# Altium PCB imx6_cpu_board.PcbDoc (part 4 of 9)
Units mil, origin at the board's own origin, x right, y up, seen from the top; angles counter-clockwise.
Board outline 2598.43 x 2362.2 mil, 8 copper layers (Top Layer, GND1, Signal Layer 1, POWER1, POWER2, Signal Layer 2, GND2, Bottom Layer), stack 66.304 mil thick; 354 components, 422 nets, 2180 pads, 1333 vias.
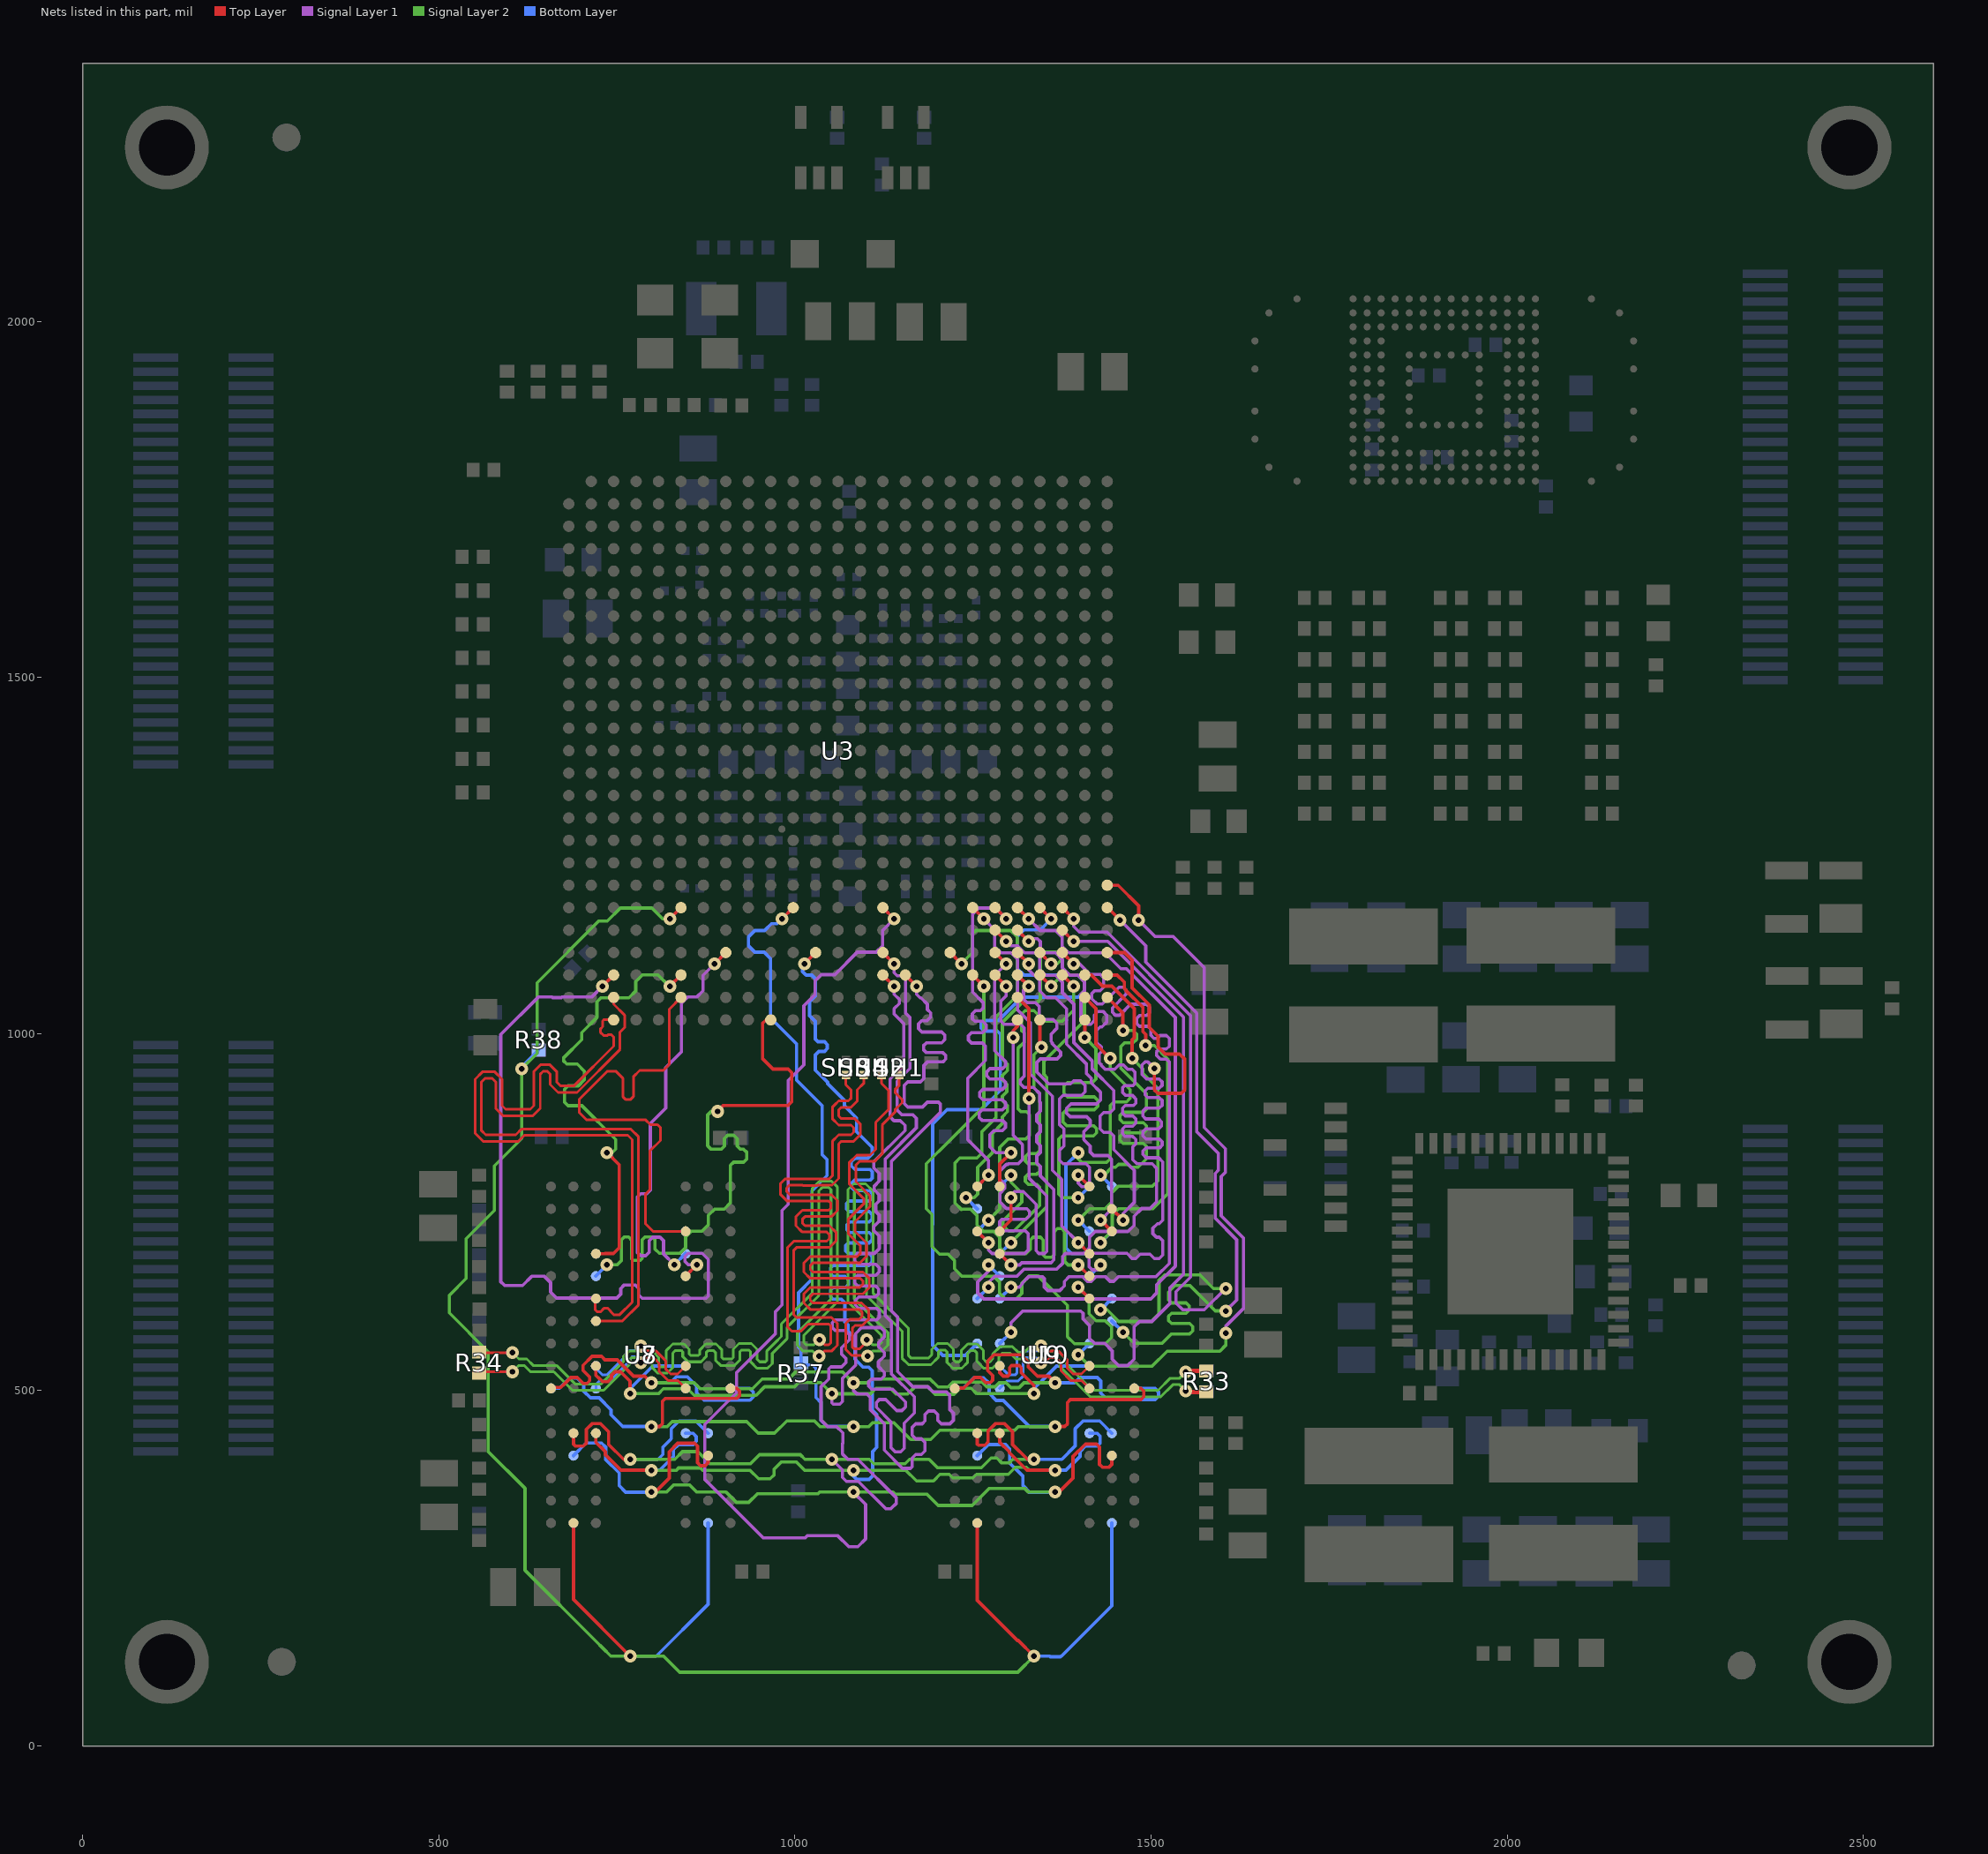
[diagram p10: the nets of this part, all layers, seen from the top]

## Via types
v1: diameter 18, hole 8, Top Layer to Bottom Layer, tented both sides, 768 vias
v2: diameter 20, hole 10, Top Layer to Bottom Layer, tented both sides, 565 vias

## Nets (pads, with @x,y where several pads share a name; then routed paths per layer and width w, separated by ;. In a path a pad name is that pad's centre, name@x,y a point inside that pad or via, vN(x,y) a via of type N, cw(c..) or ccw(c..) an arc to the next point about the centre after c; other vN are vias at no path point) (continued)
DRAM_D39: U3.AC19 U10.F7 | length 933.3
  Top Layer w4.7: U3.AC19@1249.36,1082.38 v1(1265.1,1066.63) ; v1(1397.62,643.83) U10.F7@1413.36,628.09
  Signal Layer 2 w4.5: 1217.47,850.43 1184.38,817.34 1184.38,754.34 1192.4,746.32 1192.4,701.02 1202.84,690.57 1214.97,690.57 1223.9,681.64 1223.9,670 1234.55,659.34 ; 1217.49,850.43 1237.88,870.82 1265.1,898.06 v1(1265.1,1066.63) ; 1234.59,659.38 1234.62,659.34 1279.38,659.34 1286.89,651.83 1286.89,635.83 1294.88,627.84 1310.88,627.84 1318.39,635.35 1318.39,649.35 1329.38,660.34 1340.58,660.34 1382.44,618.48 1382.44,587 1382.55,586.89 1382.55,574.45 1392.4,564.59 1435.63,564.59 1444.38,573.34 1444.38,588.14 1435.44,597.08 1422.8,597.08 1412.87,607.01 1412.87,628.58 v1(1397.62,643.83)
DRAM_D40: U3.Y19 U10.D7 | length 561.9
  Top Layer w4.7: U3.Y19@1249.36,1176.87 v1(1265.1,1161.12) ; v1(1397.62,706.82) U10.D7@1413.36,691.08
  Signal Layer 1 w4.5: v1(1265.1,1161.12) 1280.38,1145.84 1280.38,1122.34 1289.34,1113.38 1303.34,1113.38 1312.38,1104.34 1312.38,1033.34 1330.38,1015.34 1330.38,943.34 1361.38,912.34 1361.38,808.34 1374.38,795.34 1374.38,730.06 v1(1397.62,706.82)
DRAM_D41: U3.AB20 U10.A3 | length 563.5
  Top Layer w4.7: U3.AB20@1280.85,1113.88 v1(1296.6,1098.13) ; U10.A3@1287.38,785.57 1287.39,817.06 v1(1303.14,832.8)
  Signal Layer 1 w4.5: v1(1296.6,1098.13) 1280.38,1081.91 1280.38,976.11 1295.38,961.11 1295.38,955.11 1291.13,950.86 1273.6,950.86 1269.35,946.61 1269.35,940.61 1273.6,936.36 1291.13,936.36 1295.38,932.11 1295.38,926.11 1291.13,921.86 1263.63,921.86 1259.38,917.61 1259.38,911.61 1263.63,907.36 1291.13,907.36 1295.38,903.11 1295.38,897.11 1291.13,892.86 1262.63,892.86 1258.38,888.61 1258.38,882.61 1262.63,878.36 1291.13,878.36 1295.38,874.11 1295.38,868.11 1291.13,863.86 1278.9,863.86 1273.38,858.34 1273.38,841.34 1281.92,832.8 v1(1303.14,832.8)
DRAM_D42: U3.AB21 U10.C8 | length 559.1
  Top Layer w4.7: U3.AB21@1312.35,1113.88 v1(1328.1,1098.13) ; v1(1429.12,738.32) U10.C8@1444.86,722.58
  Signal Layer 1 w4.5: v1(1328.1,1098.13) 1328.1,1089.62 1343.38,1074.34 1343.38,1060.34 1353.33,1050.39 1365.91,1050.39 1381.38,1034.92 1381.38,985.33 1408.88,957.83 1408.88,944.34 1415.88,937.34 1415.88,930.84 1428.7,918.02 1428.7,906.66 1423.38,901.34 1387.38,901.34 1381.38,895.34 1381.38,888.34 1386.38,883.34 1409.38,883.34 1414.38,878.34 1414.38,871.34 1405.38,862.34 1405.38,851.34 1414.38,842.34 1414.38,833.84 1419.38,828.84 1439.38,828.84 1444.38,823.84 1444.38,753.58 v1(1429.12,738.32)
DRAM_D43: U3.AD21 U10.C3 | length 558.5
  Top Layer w4.7: U10.C3@1287.38,722.58 1303.14,738.32 v1(1303.14,769.81) ; U3.AD21@1312.35,1050.88 1328.1,1035.14 1328.1,909.62 v1(1328.38,909.34)
  Signal Layer 1 w4.5: v1(1303.14,769.81) 1303.14,773.34 1308.14,778.34 1320.38,778.34 1338.38,760.34 1338.38,695.34 1342.38,691.34 1350.38,691.34 1353.38,694.34 1353.38,772.34 1328.38,797.34 v1(1328.38,909.34)
DRAM_D44: U3.Y20 U10.A2 | length 560.1
  Top Layer w4.7: U10.A2@1255.88,785.57 v1(1271.64,801.31) ; U3.Y20@1280.85,1176.87 v1(1296.6,1161.12)
  Signal Layer 1 w4.5: v1(1271.64,801.31) 1271.64,822.08 1242.38,851.34 1242.38,937.34 1267.38,962.34 1267.38,982.57 1263.13,986.81 1247.63,986.81 1243.38,991.06 1243.38,997.07 1247.63,1001.31 1263.13,1001.31 1268.38,1006.56 1268.38,1012.34 1263.38,1017.34 1252.38,1017.34 1249.06,1020.66 1249.06,1028.02 1253.38,1032.34 1260.38,1032.34 1264.38,1036.34 1264.38,1043.34 1249.38,1058.34 1249.38,1167.67 1258.08,1176.37 1281.35,1176.37 v1(1296.6,1161.12)
DRAM_D45: U3.AA20 U10.B8 | length 566.3
  Top Layer w4.7: U3.AA20@1280.85,1145.37 v1(1296.6,1129.62) ; U10.B8@1444.86,754.07 v1(1460.62,738.32)
  Signal Layer 1 w4.5: v1(1296.6,1129.62) 1302.88,1123.34 1312.38,1123.34 1322.34,1113.38 1338.35,1113.38 1343.38,1108.35 1343.38,1090.34 1351.84,1081.88 1365.91,1081.88 1375.38,1072.41 1375.38,1057.34 1391.38,1041.34 1391.38,987.36 1417.38,961.36 1417.38,950.34 1447.38,920.34 1447.38,894.34 1442.38,889.34 1433.38,889.34 1428.38,884.34 1428.38,866.34 1433.38,861.34 1442.38,861.34 1447.38,856.34 1447.38,837.34 1476.38,808.34 1476.38,763.34 1460.62,747.58 v1(1460.62,738.32)
DRAM_D46: U3.AE21 U10.C2 | length 557.6
  Top Layer w4.7: U10.C2@1255.88,722.58 v1(1271.64,706.82) ; v1(1306.35,994.34) 1306.35,1004.34 1312.35,1010.34 U3.AE21@1312.35,1019.39
  Signal Layer 1 w4.5: v1(1271.64,706.82) 1271.64,696.34 1276.64,691.34 1322.38,691.34 1327.38,696.34 1327.38,719.34 1323.38,723.34 1291.38,723.34 1287.38,727.34 1287.38,736.34 1290.38,739.34 1324.38,739.34 1329.38,744.34 1329.38,750.34 1325.38,754.34 1299.38,754.34 1299.16,754.56 1296.82,754.56 1287.89,763.49 1287.89,776.13 1294.38,782.62 1294.38,788.5 1287.89,794.99 1287.89,807.63 1296.82,816.56 1298.6,816.56 1299.38,817.34 1313.38,817.34 1319.38,823.34 1319.38,844.31 1306.35,857.34 v1(1306.35,994.34)
DRAM_D47: U3.AC21 U10.A7 | length 559.1
  Top Layer w4.7: U3.AC21@1312.35,1082.38 v1(1328.1,1066.63) ; v1(1397.62,801.31) U10.A7@1413.36,785.57
  Signal Layer 1 w4.5: v1(1328.1,1066.63) 1325.88,1066.63 1320.88,1061.63 1320.88,1048.34 1325.88,1043.34 1337.82,1043.34 1342.82,1038.34 1342.82,1024.88 1347.82,1019.88 1362.38,1019.88 1367.38,1014.88 1367.38,1007.34 1359.38,999.34 1359.38,988.91 1361.1,987.19 1361.1,985.84 1372.88,974.05 1372.88,969.59 1367.88,964.59 1344.38,964.59 1339.38,959.59 1339.38,946.37 1356.16,929.59 1386.93,929.59 1391.37,934.03 1400.67,934.03 1407.38,927.32 1407.38,918.34 1402.38,913.34 1376.38,913.34 1371.38,908.34 1371.38,872.34 1377.38,866.34 1377.38,842.34 1371.38,836.34 1371.38,822.34 1376.38,817.34 1408.38,817.34 1413.38,812.34 1413.38,790.34 1408.38,785.34 1402.62,785.34 1397.62,790.34 v1(1397.62,801.31)
DRAM_D48: U3.AC22 U9.D7 | length 513.6
  Top Layer w4.7: U3.AC22@1343.84,1082.38 v1(1359.59,1066.63)
  Signal Layer 2 w4.5: v1(1303.14,706.82) 1353.38,757.06 1353.38,938.9 1349.26,943.02 1349.26,961.22 1406.34,1018.3 1406.34,1072.95 1397.41,1081.88 1374.84,1081.88 v1(1359.59,1066.63)
  Bottom Layer w4.7: U9.D7@1287.39,691.08 v1(1303.14,706.82)
DRAM_D49: U3.AE22 U9.A7 | length 510.2
  Top Layer w4.7: U3.AE22@1343.84,1019.39 1343.84,982.88 v1(1345.84,980.88)
  Signal Layer 2 w4.5: v1(1303.14,801.31) 1303.14,791.38 1318.39,776.13 1318.39,763.49 1291.68,736.79 1291.68,731.04 1299.97,722.75 1307.04,722.75 1343.63,759.34 1343.63,784.02 1339.38,788.27 1327.63,788.27 1323.38,792.52 1323.38,798.52 1327.63,802.77 1339.38,802.77 1343.63,807.02 1343.63,813.02 1339.38,817.27 1327.63,817.27 1323.38,821.52 1323.38,827.52 1327.63,831.77 1339.38,831.77 1343.63,836.02 1343.63,915.66 1335.38,923.91 1335.38,970.41 v1(1345.84,980.88)
  Bottom Layer w4.7: U9.A7@1287.39,785.57 v1(1303.14,801.31)
DRAM_D50: U3.AE24 U9.A3 | length 516.6
  Top Layer w4.7: v1(1406.84,994.8) U3.AE24@1406.84,1019.39
  Signal Layer 2 w4.5: v1(1397.62,769.81) 1375.38,769.81 1370.38,774.81 1370.38,852.18 1374.63,856.43 1419.13,856.43 1423.38,860.68 1423.38,866.68 1419.13,870.93 1381.38,870.93 1376.38,875.93 1376.38,888.34 1381.38,893.34 1420.38,893.34 1425.38,898.34 1425.38,906.34 1420.38,911.34 1382.38,911.34 1377.38,916.34 1377.38,926.34 1382.38,931.34 1417.38,931.34 1422.38,936.34 1422.38,979.25 v1(1406.84,994.8)
  Bottom Layer w4.7: v1(1397.62,769.81) U9.A3@1413.37,785.57
DRAM_D51: U3.AC24 U9.C3 | length 511.4
  Top Layer w4.7: U3.AC24@1406.84,1082.38 1416.06,1082.38 1431.81,1066.63 1444.86,1066.63 1476.38,1035.11 1476.38,994.34 1473.38,991.34 v1(1473.38,965.34)
  Signal Layer 2 w4.5: v1(1397.62,738.32) 1413.65,754.34 1435.22,754.34 1444.38,763.5 1444.38,776.34 1454.1,786.06 1502.1,786.06 1509.38,793.34 1509.38,923.34 1488.38,944.34 1488.38,950.34 v1(1473.38,965.34)
  Bottom Layer w4.7: v1(1397.62,738.32) U9.C3@1413.37,722.58
DRAM_D52: U3.AB22 U9.B8 | length 518.5
  Top Layer w4.7: U3.AB22@1343.84,1113.88 v1(1359.59,1098.13)
  Signal Layer 2 w4.5: v1(1240.14,769.81) 1251.38,769.81 1256.38,774.81 1256.38,812.34 1277.38,833.34 1277.38,860.34 1291.1,874.06 1291.1,883.17 1298.38,890.45 1298.38,898.88 1291.1,906.16 1291.1,912.17 1297.38,918.45 1297.38,928.88 1291.1,935.16 1291.1,941.17 1298.13,948.2 1298.13,957.14 1295.35,959.92 1291.1,964.16 1291.1,1016.06 1318.38,1043.34 1339.34,1043.34 1344.34,1048.34 1344.34,1109.37 1349.34,1114.37 1368.38,1114.37 1373.38,1109.37 1373.38,1103.13 1368.38,1098.13 v1(1359.59,1098.13)
  Bottom Layer w4.7: v1(1240.14,769.81) U9.B8@1255.89,754.07
DRAM_D53: U3.AC23 U9.C8 | length 510.4
  Top Layer w4.7: U3.AC23@1375.34,1082.38 v1(1391.09,1066.63)
  Signal Layer 2 w4.5: v1(1271.64,738.32) 1287.38,754.06 1287.38,840.34 1299.38,852.34 1324.38,852.34 1329.38,857.34 1329.38,886.26 1325.13,890.5 1317.13,890.5 1312.88,894.75 1312.88,979.3 1321.6,988.02 1321.6,1000.66 1317.88,1004.38 1317.88,1027.34 1322.88,1032.34 1335.38,1032.34 1350.38,1017.34 1375.38,1017.34 1391.09,1033.05 v1(1391.09,1066.63)
  Bottom Layer w4.7: U9.C8@1255.89,722.58 v1(1271.64,738.32)
DRAM_D54: U3.AD25 U9.A2 | length 510.9
  Top Layer w4.7: U3.AD25@1438.33,1050.88 1460.38,1028.84 v1(1460.38,1004.34)
  Signal Layer 2 w4.5: v1(1429.12,801.31) 1429.38,801.57 1434.31,801.57 1439.31,806.57 1439.31,807.34 1444.31,812.34 1450.08,812.34 1454.3,816.56 1466.93,816.56 1471.15,812.34 1481.58,812.34 1493.38,824.14 1493.38,841.85 1489.13,846.09 1460.63,846.09 1456.38,850.34 1456.38,856.35 1460.63,860.59 1489.13,860.59 1493.38,864.84 1493.38,870.85 1489.13,875.09 1460.63,875.09 1456.38,879.34 1456.38,885.35 1460.63,889.59 1489.13,889.59 1493.38,893.84 1493.38,915.59 1457.63,951.34 1457.63,982.34 1462.63,987.34 1474.81,987.34 1479.38,991.91 1479.38,999.34 1474.38,1004.34 v1(1460.38,1004.34)
  Bottom Layer w4.7: v1(1429.12,801.31) U9.A2@1444.87,785.57
DRAM_D55: U3.AC25 U9.C2 | length 515.5
  Top Layer w4.7: U3.AC25@1438.33,1082.38 1452.34,1082.38 1462.38,1072.34 1462.38,1063.34 1464.68,1061.04 1464.68,1060.73 1488.34,1037.07 1488.34,1002.93 1492.38,998.89 v1(1492.38,983.34)
  Signal Layer 2 w4.5: v1(1429.12,706.82) 1429.12,707.08 1445.37,723.33 1445.37,745.33 1454.38,754.34 1502.38,754.34 1523.38,775.34 1523.38,964.34 1504.38,983.34 v1(1492.38,983.34)
  Bottom Layer w4.7: v1(1429.12,706.82) U9.C2@1444.87,722.58
DRAM_D56: U3.AB25 U9.E3 | length 1011.3
  Top Layer w4.7: U3.AB25@1438.33,1113.88 1462.84,1113.88 1473.38,1103.34 1473.38,1064.34 1497.33,1040.39 1497.33,1008.89 1509.83,996.39 1509.83,981.39 1519.83,971.39 1539.83,971.39 1547.33,963.89 1547.33,921.39 1542.33,916.39 1509.38,916.39 1504.38,921.39 v1(1504.38,951.34)
  Signal Layer 1 w4.5: v1(1429.12,675.32) 1429.12,673.34 1424.3,668.52 1417.23,668.52 1412.87,672.88 1412.87,685.38 1419.06,691.57 1465.94,691.57 1473.17,684.34 1478.38,684.34 1484.61,690.57 1498.43,690.57 1504.66,684.34 1511.38,684.34 1516.38,689.34 1516.38,709.34 1511.38,714.34 1507.38,714.34 1502.38,719.34 1502.38,727.02 1508.7,733.34 1511.38,733.34 1516.38,738.34 1516.38,819.79 1510.33,825.84 1492.99,825.84 1488.38,830.45 1488.38,835.31 1492.63,839.56 1511.6,839.56 1515.36,843.32 1515.36,848.36 1511.66,852.06 1492.66,852.06 1488.38,856.34 1488.38,862.34 1492.38,866.34 1510.38,866.34 1514.38,870.34 1514.38,876.34 1510.38,880.34 1492.38,880.34 1488.38,884.34 1488.38,891.34 1492.38,895.34 1511.36,895.34 1515.36,899.34 1515.36,906.34 1511.36,910.34 1495.19,910.34 1491.38,914.15 1491.38,919.53 1495.19,923.34 1511.38,923.34 1515.38,927.34 1515.38,932.34 1511.38,936.34 1493.38,936.34 1487.06,942.66 1487.06,956.02 1491.38,960.34 1495.38,960.34 v1(1504.38,951.34)
  Bottom Layer w4.7: U9.E3@1413.37,659.59 v1(1429.12,675.32)
DRAM_D57: U3.AA21 U9.F8 | length 1016.3
  Top Layer w4.7: U3.AA21@1312.35,1145.37 v1(1328.1,1129.62)
  Signal Layer 1 w4.5: v1(1271.64,643.83) 1271.64,650.69 1280.29,659.34 1311.38,659.34 1318.86,666.82 ; 1318.91,666.82 1321.43,669.34 1367.38,669.34 1375.88,677.84 1375.88,687.43 1379.79,691.34 1405.38,691.34 1413.38,699.34 1413.38,714.34 1421.38,722.34 1467.38,722.34 1475.87,730.83 1475.87,743.64 ; v1(1328.1,1129.62) 1331.81,1133.34 1340.38,1133.34 1344.34,1129.38 1344.34,1119.42 1350.38,1113.38 1365.91,1113.38 1375.38,1103.91 1375.38,1092.34 1375.84,1091.88 1375.84,1091.81 1384.77,1082.88 1384.84,1082.88 1385.84,1081.88 1397.41,1081.88 1406.34,1072.95 1406.34,1071.54 1406.38,1071.49 1406.38,1061.77 1406.34,1061.73 1406.34,1060.31 1401.38,1055.35 1401.38,1018.34 1406.38,1013.34 1415.38,1013.34 1420.38,1018.34 1420.38,1026.34 1425.38,1031.34 1432.38,1031.34 1437.38,1026.34 1437.38,1015.91 1430.81,1009.34 1428.38,1009.34 1423.38,1004.34 1423.38,1001.41 1423.08,1001.12 1423.08,988.48 1423.38,988.18 1423.38,987.77 1430.38,980.77 1430.38,974.91 1427.13,971.66 1427.13,959.02 1430.38,955.77 1430.38,955.09 1435.38,950.09 1448.7,950.09 1454.95,956.34 1460.81,956.34 1467.06,950.09 1473.38,950.09 1477.38,946.09 1477.38,930.18 1474.38,927.18 1462.63,927.18 1459.88,924.43 1459.88,917.42 1463.63,913.68 1473.13,913.68 1476.88,909.93 1476.88,909.82 1478.38,908.32 1478.38,902.42 1475.13,899.18 1463.63,899.18 1459.88,895.43 1459.88,888.42 1463.63,884.68 1474.13,884.68 1478.38,880.43 1478.38,874.42 1474.13,870.18 1463.63,870.18 1459.88,866.43 1459.88,859.42 1463.63,855.68 1474.13,855.68 1478.38,851.43 1478.38,845.42 1474.13,841.18 1474.13,823.18 1479.97,817.34 1501.36,817.34 1507.36,811.34 1507.36,763.49 1498.43,754.56 1486.78,754.56 1475.87,743.65
  Bottom Layer w4.7: U9.F8@1255.89,628.09 v1(1271.64,643.83)
DRAM_D58: U3.Y25 U9.G2 | length 1015.6
  Top Layer w4.7: U3.Y25@1438.33,1176.87 1438.85,1176.87 v1(1456.38,1159.34)
  Signal Layer 1 w4.5: v1(1456.38,1159.34) 1492.38,1123.34 1492.38,1100.34 1563.88,1028.84 1563.88,862.41 1594.33,831.96 1594.33,808.39 1589.83,803.89 1589.83,740.86 1619.94,710.75 1619.94,626.17 v1(1604.6,610.84)
  Signal Layer 2 w4.5: v1(1460.62,580.84) 1476.11,565.34 1515.38,565.34 1528.63,578.59 1554.13,578.59 1558.38,582.83 1558.38,588.84 1554.13,593.09 1528.63,593.09 1524.38,597.33 1524.38,603.34 1528.63,607.59 1549.13,607.59 1553.38,611.83 1553.38,617.84 1549.13,622.09 1528.63,622.09 1524.38,626.33 1524.38,637.34 1533.38,646.34 1554.38,646.34 1589.88,610.84 v1(1604.6,610.84)
  Bottom Layer w4.7: U9.G2@1444.87,596.59 v1(1460.62,580.84)
DRAM_D59: U3.Y22 U9.H8 | length 1020.5
  Top Layer w4.7: U3.Y22@1343.84,1176.87 v1(1359.59,1161.12)
  Bottom Layer w4.7: 1193.3,587.2 1193.3,562.42 1207.38,548.34 1239.14,548.34 U9.H8@1255.89,565.1 ; 1193.3,605.97 1193.3,618.69 ; 1193.3,637.47 1193.3,650.19 ; 1193.3,668.96 1193.3,681.68 ; 1193.3,744.68 1193.3,732.17 1193.05,731.92 1193.05,700.22 1193.33,699.94 1193.33,681.72 ; 1193.3,763.45 1193.3,776.17 ; 1193.3,794.95 1193.3,807.67 ; 1193.33,587.23 1193.33,605.94 ; 1193.33,618.72 1193.33,637.44 ; 1193.33,650.22 1193.33,668.93 ; 1193.33,744.71 1193.33,763.42 ; 1193.33,776.2 1193.33,794.92 ; 1193.33,807.7 1193.33,873.29 1213.38,893.34 1261.38,893.34 1288.38,920.34 1288.38,999.26 1284.07,1003.56 1265.69,1003.56 1261.38,1007.87 1261.38,1013.95 1265.69,1018.26 1285.38,1018.26 1318.4,1051.28 1397.45,1051.28 1406.44,1060.27 1406.44,1072.99 1397.09,1082.34 1321.38,1082.34 1311.95,1091.77 1311.95,1135.98 1321.74,1145.77 1344.24,1145.77 v1(1359.59,1161.12)
DRAM_D60: U3.AB23 U9.F7 | length 1014.9
  Top Layer w4.7: U3.AB23@1375.34,1113.88 v1(1391.09,1098.13)
  Signal Layer 1 w4.5: v1(1303.14,643.83) 1314.38,643.83 1319.38,648.83 1319.38,650.15 1328.31,659.08 1347.19,659.08 1349.88,656.39 1349.88,644.34 1354.88,639.34 1371.57,639.34 1377.97,645.75 1377.97,652.03 1385.02,659.08 1403.94,659.08 1410.68,652.34 1416.06,652.34 1422.8,659.08 1435.44,659.08 1442.18,652.34 1447.56,652.34 1454.3,659.08 1507.12,659.08 1525.38,677.34 1525.38,960.34 1521.38,964.34 1512.95,964.34 1507.38,969.91 1507.38,974.34 1511.38,978.34 1521.38,978.34 1525.38,982.34 1525.38,993.34 1521.38,997.34 1512.38,997.34 1508.38,993.34 1503.95,993.34 1499.38,997.91 1499.38,1006.34 1495.38,1010.34 1483.38,1010.34 1479.38,1014.34 1479.38,1021.34 1483.38,1025.34 1493.38,1025.34 1497.38,1029.34 1497.38,1037.34 1493.38,1041.34 1471.19,1041.34 1455.78,1025.94 1449.78,1025.94 1445.53,1030.19 1445.53,1036.2 1464.67,1055.34 1464.67,1061.05 1460.63,1065.09 1454.92,1065.09 1431.38,1041.55 1424.31,1041.55 1416.64,1049.23 1416.64,1056.3 1420.52,1060.19 1428.38,1060.19 1433.38,1065.19 1433.38,1078.34 1428.77,1082.95 1414.77,1082.95 1399.59,1098.13 v1(1391.09,1098.13)
  Bottom Layer w4.7: U9.F7@1287.39,628.09 v1(1303.14,643.83)
DRAM_D61: U3.AA23 U9.H7 | length 1012.4
  Top Layer w4.7: U3.AA23@1375.34,1145.37 v1(1391.09,1129.62)
  Signal Layer 1 w4.5: v1(1303.14,580.84) 1303.14,594.1 1319.62,610.58 1401.14,610.58 1404.38,607.34 1404.38,599.48 1413.38,590.48 1413.38,572.34 1420.13,565.59 1434.44,565.59 1445.37,554.66 1445.37,543.02 1454.3,534.09 1466.93,534.09 1475.87,543.02 1475.87,588.34 1483.61,596.09 1501.13,596.09 1526.38,621.34 1526.38,643.34 1545.38,662.34 1545.38,1023.28 1439.04,1129.62 v1(1391.09,1129.62)
  Bottom Layer w4.7: U9.H7@1287.39,565.1 v1(1303.14,580.84)
DRAM_D62: U3.Y23 U9.F2 | length 1013.9
  Top Layer w4.7: U3.Y23@1375.34,1176.87 v1(1391.09,1161.12)
  Signal Layer 1 w4.5: v1(1391.09,1161.12) 1391.09,1150.58 1399.03,1142.64 1438.05,1142.64 1555.38,1025.31 1555.38,658.39 1534.88,637.89 1534.88,621.84 1544.38,612.34 1574.61,612.34 v1(1604.6,642.33)
  Signal Layer 2 w4.5: v1(1429.12,612.33) 1438.13,612.33 1454.38,596.09 1500.43,596.09 1511.03,606.69 1511.03,653.64 1518.73,661.34 1568.59,661.34 1587.6,642.33 v1(1604.6,642.33)
  Bottom Layer w4.7: v1(1429.12,612.33) U9.F2@1444.87,628.09
DRAM_D63: U3.W25 U9.H3 | length 1012.2
  Top Layer w4.7: U3.W25@1438.33,1208.36 1453.69,1208.36 1482.38,1179.67 v1(1482.38,1159.34)
  Signal Layer 1 w4.5: v1(1482.38,1159.34) 1505.38,1136.34 1530.82,1136.34 1574.38,1092.78 1574.38,868.34 1604.33,838.39 1604.33,805.39 1598.33,799.39 1598.33,744.39 1629.37,713.35 1629.37,614.05 1604.6,589.28 v1(1604.6,579.34)
  Signal Layer 2 w4.5: v1(1397.62,549.34) 1413.87,533.09 1501.13,533.09 1522.38,554.34 1596.34,554.34 1604.6,562.6 v1(1604.6,579.34)
  Bottom Layer w4.7: v1(1397.62,549.34) U9.H3@1413.37,565.1
DRAM_DQM0: U3.AC3 U8.E7 | length 1025.1
  Top Layer w4.7: v1(729.67,1066.63) U3.AC3@745.42,1082.38 ; U8.E7@846.43,659.59 846.44,659.89 v1(862.13,675.58)
  Signal Layer 1 w4.5: v1(729.67,1066.63) 714.42,1051.38 673,1051.38 672.21,1050.59 659.57,1050.59 658.78,1051.38 639.42,1051.38 586.89,998.85 586.89,651.83 592.38,646.34 617.38,646.34 630.38,659.34 648.19,659.34 656.89,650.64 656.89,637.34 665.4,628.83 749.87,628.83 755.38,634.34 755.38,642.34 760.38,647.34 775.38,647.34 780.38,642.34 780.38,633.59 785.38,628.59 875.38,628.59 878.37,631.58 878.37,681.9 ; v1(862.13,675.58) 850.14,675.58 845.38,680.34 845.38,687.34 849.86,691.82 869.71,691.82 878.4,683.14 878.4,681.93
DRAM_DQM1: U3.AC6 U8.D3 | length 653.9
  Top Layer w4.7: U8.D3@720.45,691.08 733.13,691.07 733.38,691.32 745.1,691.32 753.27,699.49 753.27,815.91 v1(736.13,833.06) ; v1(824.16,1066.63) U3.AC6@839.91,1082.38
  Signal Layer 2 w4.5: v1(736.13,833.06) 743.38,833.06 748.38,838.06 748.38,851.44 700.98,898.84 681.38,898.84 676.38,903.84 676.38,921.74 681.38,926.74 695.78,926.74 704.38,935.34 704.38,947.34 694.38,957.34 679.38,957.34 675.38,961.34 675.38,966.34 700.38,991.34 700.38,1001.34 721.92,1022.88 721.92,1044.88 727.38,1050.34 766.83,1050.34 776.44,1059.95 776.44,1073.4 785.38,1082.34 807.78,1082.34 823.49,1066.63 v1(824.16,1066.63)
DRAM_DQM2: U3.AB8 U7.D3 | length 608.4
  Top Layer w4.7: v1(887.15,1098.13) U3.AB8@902.9,1113.88
  Signal Layer 1 w4.5: v1(830.63,675.58) 815.37,690.84 815.37,709.34 810.37,714.34 800.38,714.34 795.38,709.34 795.38,693.34 790.38,688.34 783.38,688.34 778.38,693.34 778.38,770.24 783.38,775.24 791.89,775.24 796.89,780.24 796.89,873.85 818.53,895.49 818.53,952.49 840.41,974.37 840.41,1042.45 849.34,1051.38 861.98,1051.38 870.91,1060.31 870.91,1081.88 v1(887.15,1098.13)
  Bottom Layer w4.7: v1(830.63,675.58) 846.29,691.23 846.38,691.32 846.44,691.26 U7.D3@846.44,691.08
DRAM_DQM3: U3.AE10 U7.E7 | length 848.2
  Top Layer w4.7: v1(891.38,890.84) 894.73,894.19 894.73,894.34 899.73,899.34 990.38,899.34 995.38,904.34 995.38,945.34 990.38,950.34 969.19,950.34 954.38,965.15 954.38,1014.39 959.38,1019.39 U3.AE10@965.89,1019.39
  Signal Layer 2 w4.5: v1(736.13,675.58) 750.37,675.58 756.36,681.57 756.36,710.57 760.39,714.59 766.39,714.59 770.86,710.12 770.86,683.84 773.11,681.59 782.39,681.59 785.36,684.57 785.36,710.57 789.39,714.59 799.39,714.59 803.39,710.59 803.39,697.59 809.39,691.59 838.39,691.59 846.39,699.59 846.39,714.59 854.39,722.59 869.39,722.59 878.39,731.59 878.39,732.24 ; 878.37,732.25 878.37,744.89 887.31,753.82 899.94,753.82 900.11,753.65 900.45,753.65 909.39,762.59 909.39,815.17 913.89,819.67 927.88,819.67 932.38,824.17 932.38,833.17 927.88,837.67 923.35,837.67 918.85,842.17 918.85,852.84 914.35,857.34 905.35,857.34 900.85,852.84 900.85,842.17 896.35,837.67 882.38,837.67 877.38,842.67 877.38,885.84 882.38,890.84 v1(891.38,890.84)
  Bottom Layer w4.7: U7.E7@720.46,659.59 720.46,659.75 720.38,659.83 v1(736.13,675.58)
DRAM_DQM4: U3.AB18 U10.E7 | length 927
  Top Layer w4.7: U3.AB18@1217.86,1113.88 v1(1233.61,1098.13) ; v1(1397.62,675.32) U10.E7@1413.36,659.59
  Signal Layer 2 w4.5: v1(1233.61,1098.13) 1248.86,1113.38 1248.86,1139.87 1253.86,1144.87 1302.92,1144.87 1311.85,1135.94 1311.85,1053.34 1282.1,1023.59 1282.1,882.06 1262.38,862.34 1262.38,832.34 1255.38,825.34 1231.38,825.34 1224.38,818.34 1224.38,762.34 1233.49,753.23 1233.83,753.57 1246.46,753.57 1255.39,744.63 1255.39,732 ; 1255.38,731.98 1255.38,731.34 1264.38,722.34 1279.38,722.34 1287.38,714.34 1287.38,699.34 1295.38,691.34 1324.38,691.34 1330.38,697.34 1330.38,710.34 1334.38,714.34 1344.38,714.34 1348.4,710.32 1348.4,689.32 1351.38,686.34 1360.66,686.34 1363.9,689.59 1363.9,721.86 1368.38,726.34 1374.38,726.34 1378.4,722.32 1378.4,680.32 1383.4,675.32 v1(1397.62,675.32)
DRAM_DQM5: U3.AC20 U10.D3 | length 564.6
  Top Layer w4.7: U3.AC20@1280.85,1082.38 v1(1296.6,1066.63) ; U10.D3@1287.38,691.08 v1(1303.14,675.32)
  Signal Layer 1 w4.5: v1(1296.6,1066.63) 1296.6,1053.34 1288.88,1045.62 1288.88,1017.84 1293.38,1013.34 1316.88,1013.34 1321.88,1008.34 1321.88,940.32 1316.38,934.82 1316.38,929.59 1321.38,924.59 1334.7,924.59 1343.63,915.66 1343.63,904.34 1344.38,903.59 1344.38,891.3 1339.38,886.3 1339.38,876.8 1344.38,871.8 1344.38,862.3 1339.38,857.3 1339.38,847.8 1344.38,842.8 1344.38,833.3 1339.38,828.3 1339.38,818.8 1344.38,813.8 1344.38,800.32 1363.38,781.32 1363.38,682.32 1359.4,678.34 1318.4,678.34 1315.38,675.32 v1(1303.14,675.32)
DRAM_DQM6: U3.AD24 U9.D3 | length 509.5
  Top Layer w4.7: U3.AD24@1406.84,1050.88 1422.58,1035.14 1422.58,1012.86 1422.38,1012.66 1422.38,985.34 v1(1442.38,965.34)
  Signal Layer 2 w4.5: v1(1397.62,832.8) 1397.62,824.34 1402.62,819.34 1437.38,819.34 1442.38,824.34 1442.38,899.34 1447.38,904.34 1465.38,904.34 1470.38,909.34 1470.38,921.34 1442.38,949.34 v1(1442.38,965.34)
  Bottom Layer w4.7: v1(1397.62,832.8) 1380.48,815.66 1380.48,699.24 1388.65,691.07 U9.D3@1413.37,691.08
DRAM_DQM7: U3.Y21 U9.E7 | length 1016.8
  Top Layer w4.7: U3.Y21@1312.35,1176.87 v1(1328.1,1161.12)
  Signal Layer 1 w4.5: v1(1271.64,675.32) 1271.64,666.6 1256.39,651.35 1256.39,636.28 1265.09,627.58 1499.38,627.58 1507.36,635.56 1507.36,647.06 1533.88,673.58 1533.88,1022.75 1465.24,1091.39 1457.33,1091.39 1435.27,1113.45 1416.27,1113.45 1416.2,1113.38 1384.34,1113.38 1374.84,1122.88 1374.84,1135.94 1365.91,1144.87 1344.34,1144.87 v1(1328.1,1161.12)
  Bottom Layer w4.7: v1(1271.64,675.32) U9.E7@1287.39,659.59
DRAM_RAS_B: U3.AB15 U7.J3 U8.J3 U9.J3 U10.J3 | length 2284.2
  Top Layer w4.7: U8.J3@720.45,533.6 720.46,520.45 725.46,515.45 725.99,515.45 730.05,511.39 737.33,511.39 742.33,516.39 742.33,520.34 747.33,525.34 755.07,525.34 768.38,512.03 768.38,494.66 v1(768.45,494.59) ; U3.AB15@1123.37,1113.88 v1(1139.12,1098.13) ; U10.J3@1287.38,533.6 1287.39,524.34 1292.39,519.34 1298.38,519.34 1301.38,522.34 1301.38,531.34 1304.06,534.02 1314.63,534.02 1317.34,531.3 1317.34,524.3 1335.31,506.34 v1(1335.38,494.59) v1(1335.38,494.59)
  Signal Layer 1 w4.5: v1(1051.88,494.59) 1051.88,481.84 1053.88,479.84 1062.88,479.84 1066.63,483.59 1066.63,516.26 1085.04,534.67 1085.04,579 1093.38,587.34 1120.38,587.34 1125.38,582.34 1125.38,574.34 1117.38,566.34 1117.38,560.34 1125.38,552.34 1125.38,547.54 1117.13,539.3 1117.13,532.8 1125.38,524.55 1125.38,519.55 1121.13,515.3 1107.59,515.3 1103.38,511.08 1103.38,505.13 1107.59,500.91 1137.13,500.91 1155.01,483.04 1155.01,475.97 1149.92,470.88 1142.84,470.88 1127.31,486.41 1118.38,486.41 1114.13,482.17 1114.13,475.62 1134.88,454.87 1134.88,418.79 1140.57,413.09 1148.45,413.09 1153.38,418.02 1153.38,453.34 1167.38,467.34 1167.38,490.34 1135.37,522.35 1135.37,595.35 1126.87,603.85 1126.87,824.43 1170.38,867.94 1170.38,881.34 1165.38,886.34 1149.81,886.34 1143.38,892.77 1143.38,933.31 1161.38,951.31 1161.38,1022.8 1155.37,1028.82 1155.37,1069.35 ; v1(1139.12,1098.13) 1139.12,1085.6 1143.38,1081.34 1150.38,1081.34 1155.38,1076.34 1155.38,1069.37
  Signal Layer 2 w4.5: v1(768.45,494.59) 808.38,494.59 815.23,501.44 849.28,501.44 858.38,492.34 945.38,492.34 957.38,504.34 999.38,504.34 1005.38,510.34 1036.13,510.34 v1(1051.88,494.59) 1051.93,494.54 1105.98,494.54 1113.78,502.34 1133.38,502.34 1141.38,494.34 1158.38,494.34 1168.38,504.34 1186.41,504.34 1196.86,493.89 1223.38,493.89 1231.83,502.34 1247.55,502.34 1255.3,494.59 v1(1335.38,494.59)
  Bottom Layer w4.7: v1(768.45,494.59) 768.45,501.65 789.74,522.94 ; 789.74,522.99 800.34,533.59 U7.J3@846.44,533.6 ; v1(1335.38,494.59) 1335.38,501.65 1356.72,522.99 ; 1356.74,522.99 1367.34,533.59 U9.J3@1413.37,533.6
DRAM_RESET_B: R38.1 U3.Y6 U7.T2 U8.T2 U9.T2 U10.T2 | length 2947.3
  Top Layer w4.7: U8.T2@688.95,313.13 688.96,205.68 v1(768.45,126.19) ; v1(824.16,1161.12) U3.Y6@839.91,1176.87 ; U10.T2@1255.88,313.13 1255.89,204.52 1312.22,148.19 1313.38,148.19 v1(1335.38,126.19)
  Signal Layer 2 w4.5: v1(824.16,1161.12) 814.23,1161.12 798.98,1176.37 754.85,1176.37 736.48,1158 724.44,1158 637.89,1071.44 637.89,972.42 v1(616.27,950.8) 616.27,852.73 577.88,814.34 577.88,751.84 538.38,712.34 538.38,656.38 514.63,632.64 514.63,608.09 569.38,553.34 569.38,413.34 620.89,361.83 620.89,246.83 721.08,146.64 721.15,146.64 730.08,137.71 730.08,137.64 741.53,126.19 v1(768.45,126.19) 815.53,126.19 838.12,103.6 1312.78,103.6 v1(1335.38,126.19)
  Bottom Layer w4.5: v1@616.95,951.49 616.95,953.92 R38.1@639.99,976.95
  Bottom Layer w4.7: v1(768.45,126.19) 805.3,126.19 877.94,198.83 U7.T2@877.94,313.13 ; v1(1335.38,126.19) 1357.6,126.19 1358.6,125.19 1372.16,125.19 1373.16,126.19 1374.23,126.19 1444.87,196.83 U9.T2@1444.87,313.13
  Bottom Layer w10: v1(616.27,950.8) v1@616.95,951.49
DRAM_SDBA0: U3.AC15 U7.M2 U8.M2 U9.M2 U10.M2 | length 2502.4
  Top Layer w4.7: U8.M2@688.95,439.11 688.96,423.84 691.85,420.96 703.11,420.96 707.11,424.96 707.1,444.64 715.01,452.54 727.18,452.54 738.38,441.34 738.38,423.41 759.3,402.49 v1(768.45,402.49) ; U3.AC15@1123.37,1082.38 v1(1139.12,1066.63) ; U10.M2@1255.88,439.11 1255.89,423.83 1257.38,422.34 1266.56,422.34 1270.98,426.76 1270.98,442.34 1281.18,452.54 1294.11,452.54 1305.31,441.34 1305.31,423.41 1326.23,402.49 v1(1335.38,402.49)
  Signal Layer 1 w4.5: v1(1051.88,402.49) 1066.63,387.74 1066.63,377.09 1072.03,371.69 1089.03,371.69 1127.38,333.34 1134.88,333.34 1142.37,340.83 1142.37,348.22 1088.19,402.39 1074.33,402.39 1066.38,410.34 1066.38,423.91 1067.13,424.66 1067.13,439.51 1058.2,448.44 1046.38,448.44 1046.18,448.64 1045.56,448.64 1036.63,457.57 1036.63,504.59 1047.38,515.34 1047.38,529.28 1050.34,532.24 1065.34,532.24 1071.34,538.24 1071.34,544.24 1065.34,550.24 1065.34,559.24 1076.54,570.45 1076.54,577.24 1070.54,583.24 1056.34,583.24 1052.34,587.24 1052.34,594.34 1056.34,598.34 1114.69,598.34 1118.37,602.02 1118.37,610.66 1114.69,614.34 1089.38,614.34 1084.38,619.34 1084.38,625.34 1089.38,630.34 1112.77,630.34 1117.38,634.95 1117.38,641.47 1112.77,646.09 1087.63,646.09 1083.88,649.83 1083.88,656.84 1087.63,660.59 1113.37,660.59 1118.37,665.59 1118.37,671.34 1113.37,676.34 1088.88,676.34 1083.88,681.34 1083.88,687.15 1088.07,691.34 1111.38,691.34 1118.37,698.33 1118.37,715.78 1110.38,723.77 1110.38,728.98 1118.37,736.97 1118.37,745.35 1113.38,750.34 1113.38,760.34 1118.37,765.33 1118.37,773.35 1115.38,776.34 1115.38,776.48 1111.38,780.48 1111.38,786.19 1118.37,793.19 1118.37,803.86 1110.38,811.86 1110.38,819.97 1154.38,863.97 1154.38,871.34 1147.88,877.84 1138.88,877.84 1133.38,883.34 1133.38,936.34 1152.88,955.84 1152.88,1013.84 1139.12,1027.6 1139.12,1035.08 1146.38,1042.34 1146.38,1048.08 1139.12,1055.34 v1(1139.12,1066.63)
  Signal Layer 2 w4.5: v1(768.45,402.49) 831.23,402.49 842.08,413.34 863.38,413.34 880.38,396.34 937.38,396.34 950.05,409.01 1007.45,409.01 1013.97,402.49 v1(1051.88,402.49) 1051.98,402.59 1104.38,402.59 1110.63,396.34 1154.38,396.34 1160.63,402.59 1187.7,402.59 1187.8,402.49 1188.18,402.49 1199.33,391.34 1199.85,390.84 1261.73,390.84 1275.23,404.34 1283.53,404.34 1290.53,397.34 1300.38,397.34 1305.53,402.49 v1(1335.38,402.49)
  Bottom Layer w4.7: v1(768.45,402.49) 807.6,402.49 814.45,409.34 814.45,419.54 826.38,431.47 826.38,445.34 837.38,456.34 860.7,456.34 U7.M2@877.94,439.11 ; v1(1335.38,402.49) 1374.53,402.49 1393.31,421.27 1393.31,445.34 1404.31,456.34 1427.63,456.34 U9.M2@1444.87,439.11
DRAM_SDBA1: U3.Y15 U7.N8 U8.N8 U9.N8 U10.N8 | length 2560.3
  Top Layer w4.7: v1(798.45,356.44) 803.55,356.44 823.45,376.34 823.45,413.04 835.41,424.99 859.13,424.99 863.13,420.99 863.13,397.64 867.13,393.64 873.94,393.64 877.94,397.64 U8.N8@877.93,407.62 ; U3.Y15@1123.37,1176.87 v1(1139.12,1161.12) ; v1(1365.38,356.44) 1370.48,356.44 1390.38,376.34 1390.38,406.41 1407.81,423.84 1423.38,423.84 1427.38,419.84 1427.38,395.44 1431.38,391.44 1440.87,391.44 1444.87,395.44 U10.N8@1444.86,407.62
  Signal Layer 1 w4.5: v1(1081.88,356.44) 1099.18,339.14 1099.18,290.78 1088.2,279.79 1075.56,279.79 1060.21,295.14 1017.18,295.14 1014.38,292.34 955.38,292.34 873.38,374.34 873.38,451.34 917.88,495.84 917.88,524.27 972.63,579.02 972.63,610.09 981.88,619.34 981.88,751.84 990.38,760.34 990.38,934.34 1012.38,956.34 1012.38,1039.34 1028.39,1055.35 1028.39,1074.34 1036.92,1082.88 1055.92,1082.88 1087.41,1114.37 1113.94,1114.37 1122.87,1123.3 1122.87,1144.87 v1(1139.12,1161.12)
  Signal Layer 2 w4.5: v1(798.45,356.44) 819.48,356.44 829.38,366.34 852.43,366.34 862.33,356.44 903.28,356.44 917.62,342.1 935.11,342.1 947.35,354.34 1032.28,354.34 1034.38,356.44 v1(1081.88,356.44) 1137.38,356.44 1140.48,353.34 1185.36,353.34 1200.86,337.84 1248.79,337.84 1272.33,361.39 1322.79,361.39 1327.73,356.44 v1(1365.38,356.44)
  Bottom Layer w4.7: U7.N8@688.96,407.62 706.7,425.34 728.45,425.34 734.38,419.41 734.38,401.96 753.1,383.24 753.1,365.43 762.09,356.44 v1(798.45,356.44) ; U9.N8@1255.89,407.62 1271.5,423.22 1295.5,423.22 1301.31,417.41 1301.31,397.41 1320.03,378.69 1320.03,365.43 1329.02,356.44 v1(1365.38,356.44)
DRAM_SDBA2: U3.AB12 U7.M3 U8.M3 U9.M3 U10.M3 | length 2328.9
  Top Layer w4.7: U8.M3@720.45,439.11 720.46,426.49 733.81,413.14 733.81,408.91 755.58,387.14 v1(798.45,387.14) ; v1(1013.14,1098.13) U3.AB12@1028.88,1113.88 ; U10.M3@1287.38,439.11 1287.39,426.49 1300.74,413.14 1300.74,411.98 1325.58,387.14 v1(1365.38,387.14)
  Signal Layer 2 w4.5: v1(798.45,387.14) 833.38,387.14 836.58,390.34 867.33,390.34 870.53,387.14 936.81,387.14 948.86,375.09 965.13,375.09 970.52,380.48 970.52,388.58 975.43,393.49 980.54,398.59 1002.13,398.59 1013.58,387.14 v1(1081.88,387.14) 1155.58,387.14 1170.63,372.09 1194.38,372.09 1203.63,381.34 1216.38,381.34 1221.38,376.34 1249.83,376.34 1254.83,381.34 1299.38,381.34 1309.38,391.34 1324.96,391.34 1329.06,387.24 1329.48,387.24 1329.58,387.14 v1(1365.38,387.14)
  Bottom Layer w4.7: v1(798.45,387.14) 810.13,387.14 829.36,406.37 829.36,416.32 836.38,423.34 856.76,423.34 861.38,427.96 861.38,434.49 856.76,439.1 U7.M3@846.44,439.11 ; v1(1013.14,1098.13) 1010.69,1095.68 1010.69,1087.34 1015.69,1082.34 1023.49,1082.34 1028.49,1077.34 1028.49,1053.02 1020.58,1045.11 1020.58,1025.17 1028.49,1017.26 1028.49,992.23 1032.08,988.64 1041.4,988.64 1045.38,984.66 1045.38,979.02 1041.4,975.04 1033.38,975.04 1028.38,970.04 1028.38,948.86 1033.69,943.56 1045.68,931.57 1045.68,929.97 1064.23,911.42 1067.38,908.26 1069.38,906.25 1069.38,898.72 1086.38,881.72 1086.38,862.34 1108.38,840.34 1108.38,831.34 1102.38,825.34 1084.38,825.34 1079.07,820.03 1079.07,814.34 1084.07,809.34 1105.38,809.34 1108.38,806.34 1108.38,797.34 1105.46,794.42 1083.69,794.42 1079.38,790.12 1079.38,784.03 1083.69,779.72 1104.27,779.72 1108.57,775.42 1108.57,769.33 1104.27,765.02 1075.69,765.02 1072.08,761.42 1072.08,753.93 1075.69,750.32 1104.27,750.32 1108.57,746.02 1108.57,739.93 1104.27,735.62 1076.69,735.62 1073.08,732.02 1073.08,724.53 1076.69,720.92 1104.27,720.92 1108.57,716.62 1108.57,710.53 1104.27,706.22 1074.69,706.22 1071.08,702.62 1071.08,695.13 1074.69,691.52 1104.27,691.52 1108.57,687.22 1108.57,679.63 1103.57,674.63 1053.38,674.63 1049.88,671.13 1049.88,662.84 1053.38,659.34 1070.38,659.34 1075.38,654.34 1075.38,648.34 1070.38,643.34 1053.38,643.34 1049.88,639.84 1049.88,630.84 1053.38,627.34 1065.08,627.34 1070.08,622.34 1070.08,595.34 1074.38,591.04 1074.38,582.49 1084.38,572.49 1084.38,543.13 1095.52,531.99 1103.57,531.99 1108.57,526.99 1108.57,471.45 1114.08,465.95 1114.63,465.4 1114.63,419.13 1108.98,413.48 1108.98,379.34 1103.98,374.34 1086.88,374.34 1081.88,379.34 v1(1081.88,387.14) ; v1(1365.38,387.14) 1380.49,387.14 1400.02,406.67 1400.02,413.14 1407.84,420.96 1424.38,420.97 1428.38,424.96 1428.38,435.1 1424.38,439.1 U9.M3@1413.37,439.11
DRAM_SDCKE0: R37.1 U3.Y11 U7.K9 U8.K9 U9.K9 U10.K9 | length 2234.7
  Top Layer w4.7: v1(798.45,448.54) 809.8,448.54 813.8,452.54 813.8,483.89 817.8,487.89 918.33,487.89 922.33,491.89 922.33,498.1 918.33,502.1 U8.K9@909.42,502.11 ; v1(981.64,1161.12) U3.Y11@997.39,1176.87 ; v1(1365.38,448.54) 1378.58,448.54 1382.58,452.54 1382.58,482.34 1386.58,486.34 1485.68,486.34 1489.68,490.34 1489.68,498.1 1485.68,502.1 U10.K9@1476.35,502.11
  Signal Layer 2 w4.5: v1(798.45,448.54) 820.58,448.54 827.43,455.39 932.33,455.39 948.38,439.34 971.38,439.34 988.43,456.39 1027.33,456.39 1035.18,448.54 v1(1081.88,448.54) 1103.58,448.54 1108.93,453.89 1138.83,453.89 1162.38,430.34 1190.38,430.34 1203.38,443.34 1308.38,443.34 1313.58,448.54 v1(1365.38,448.54)
  Bottom Layer w4.7: U7.K9@657.47,502.11 669.14,502.1 683.38,516.34 694.38,516.34 703.38,507.34 703.38,498.34 712.97,488.75 724.97,488.75 741.78,471.94 741.78,464.94 758.18,448.54 v1(798.45,448.54) ; v1(981.64,1161.12) 974.99,1154.47 966.88,1154.47 957.38,1144.97 943.78,1144.97 934.79,1135.98 934.79,1123.26 943.78,1114.27 956.5,1114.27 965.68,1105.1 965.68,1022.35 1002.28,985.75 1002.28,934.66 1038.13,898.81 1038.13,830.14 1044.93,823.34 1044.93,800.67 1023.78,779.52 1023.78,655.38 1004.83,636.44 1004.83,559.75 1008.34,556.24 R37.1@1008.34,538.24 1011.47,535.11 1024.45,535.11 1027.52,531.99 1029.34,530.17 1029.34,489.24 1036.53,482.05 1036.53,457.19 1045.18,448.54 v1(1081.88,448.54) ; U9.K9@1224.4,502.11 1236.04,502.1 1250.89,516.94 1264.83,516.94 1272.41,509.36 1272.41,495.31 1282.38,485.34 1292.22,485.34 1329.02,448.54 v1(1365.38,448.54)
DRAM_SDCLK0: R33.1 SH1.2 U9.J7 U10.J7 | length 2082.1
  Top Layer w3.7: v1(1100.88,570.34) 1100.88,567.84 1090.38,557.34 1083.38,557.34 1080.38,560.34 1080.38,586.34 1084.38,590.34 1094.38,590.34 1103.38,599.34 1103.38,612.34 1093.68,622.04 1025.08,622.04 1021.38,625.74 1021.38,631.04 1025.08,634.74 1095.41,634.74 1104.38,643.71 1104.38,656.47 1095.41,665.44 1025.08,665.44 1021.38,669.14 1021.38,674.44 1025.08,678.14 1050.38,678.14 1091.17,678.13 1100.38,687.34 1100.38,706.34 1084.2,722.52 1084.2,736.16 1105.38,757.34 1105.38,772.34 1085.38,792.34 1085.38,815.65 1090.38,820.65 1111.66,820.65 1116.38,825.37 1122.38,831.38 1122.38,871.86 1140.38,889.86 1140.38,893.34 1150.38,903.34 1150.38,907.34 1140.38,917.34 1140.38,921.43 1146.38,927.43 SH1.2@1146.38,941.83 ; v1(1345.38,561.34) 1350.38,561.34 1357.38,554.34 1370.04,554.34 1382.38,542 1382.38,530.34 1390.38,522.34 1402.12,522.34 U10.J7@1413.36,533.6
  Top Layer w6: v1(1548.49,525.27) 1549.81,526.6 R33.1@1577.38,526.6
  Signal Layer 2 w3.8: v1(1100.88,570.34) 1101.88,570.34 1108.88,563.34 1118.38,563.34 1121.38,566.34 1121.38,576.61 1074.31,623.68 1074.31,781.27 1082.38,789.34 1099.11,789.34 1109.38,779.07 1109.38,636.07 1159.38,586.07 1159.38,548.16 1163.18,544.36 1187.11,544.36 1192.11,549.36 1192.11,557.07 1200.07,565.03 1214.42,565.03 1222.38,557.07 1222.38,542.34 1225.38,539.34 1230.38,539.34 1233.38,542.34 1233.38,555.07 1242.65,564.34 1255.38,564.34 1264.38,555.34 1264.38,543.34 1268.38,539.34 1273.38,539.34 1277.38,543.34 1277.38,550.34 1287.65,560.61 1305.38,560.61 1313.65,552.34 1321.38,552.34 1330.38,561.34 v1(1345.38,561.34) 1350.38,561.34 1357.38,554.34 1369.11,554.34 1380.38,543.07 1380.38,537.07 1418.11,499.34 1509.65,499.34 1526.65,516.34 1539.79,516.34 1548.49,525.04 v1(1548.49,525.27)
  Bottom Layer w3.7: U9.J7@1287.39,533.6 1287.39,533.33 1299.38,521.34 1309.38,521.34 1311.38,523.34 1311.38,546.34 1319.38,554.34 1338.38,554.34 v1(1345.38,561.34)
DRAM_SDCLK0_B: R33.2 SH2.2 U9.K7 U10.K7 | length 2081.2
  Top Layer w3.7: v1(1101.88,547.34) 1100.88,548.34 1079.65,548.34 1071.38,556.61 1071.38,593.34 1077.38,599.34 1090.38,599.34 1094.38,603.34 1094.38,608.61 1089.95,613.04 1021.35,613.04 1012.38,622.01 1012.38,634.77 1021.35,643.74 1090.78,643.74 1095.38,648.34 1095.38,652.74 1091.68,656.44 1021.35,656.44 1012.38,665.41 1012.38,678.17 1021.35,687.14 1072.81,687.14 1087.44,687.13 1091.38,691.07 1091.38,702.61 1075.2,718.79 1075.2,739.89 1096.38,761.07 1096.38,768.61 1076.38,788.61 1076.38,819.38 1086.65,829.65 1105.38,829.65 1113.38,837.65 1113.38,875.59 1131.38,893.59 1131.38,920.34 1121.38,930.34 SH2.2@1121.38,941.83 ; v1(1345.38,538.34) 1350.38,538.34 1357.38,545.34 1366.31,545.34 1373.38,538.27 1373.38,526.61 1386.65,513.34 1402.13,513.34 U10.K7@1413.36,502.11
  Top Layer w6: v1(1548.49,498.41) 1549.82,497.08 R33.2@1577.38,497.08
  Signal Layer 2 w3.8: v1(1101.88,547.34) 1108.88,554.34 1122.11,554.34 1130.38,562.61 1130.38,580.34 1083.31,627.41 1083.31,777.54 1086.11,780.34 1095.38,780.34 1100.38,775.34 1100.38,632.34 1150.38,582.34 1150.38,544.43 1159.45,535.36 1190.84,535.36 1201.11,545.63 1201.11,553.34 1203.8,556.03 1210.69,556.03 1213.38,553.34 1213.38,538.61 1221.65,530.34 1234.11,530.34 1242.38,538.61 1242.38,551.34 1246.38,555.34 1251.65,555.34 1255.38,551.61 1255.38,539.61 1264.65,530.34 1277.11,530.34 1286.38,539.61 1286.38,546.61 1291.38,551.61 1301.65,551.61 1309.92,543.34 1325.11,543.34 1330.11,538.34 v1(1345.38,538.34) 1350.38,538.34 1357.38,545.34 1365.38,545.34 1371.38,539.34 1371.38,533.34 1414.38,490.34 1513.38,490.34 1530.38,507.34 1539.79,507.34 1548.49,498.64 v1(1548.49,498.41)
  Bottom Layer w3.7: U9.K7@1287.39,502.11 1287.39,502.35 1297.38,512.34 1313.11,512.34 1320.38,519.61 1320.38,542.61 1323.11,545.34 1338.38,545.34 v1(1345.38,538.34)
DRAM_SDCLK1: R34.1 SH3.2 U7.J7 U8.J7 | length 2113.4
  Top Layer w3.7: v1(783.38,561.34) 790.38,554.34 805.11,554.34 818.38,541.07 818.38,529.34 825.38,522.34 835.19,522.34 U8.J7@846.43,533.6 ; v1(1034.55,570.34) 1041.55,563.34 1047.38,563.34 1050.38,566.34 1050.38,589.61 1047.65,592.34 1018.38,592.34 1008.38,582.34 995.38,582.34 989.38,588.34 989.38,699.87 998.35,708.84 1044.66,708.84 1048.38,712.56 1048.38,717.82 1044.66,721.54 1010.37,721.54 1001.38,730.53 1001.38,743.25 1010.37,752.24 1047.28,752.24 1050.38,755.34 1050.38,761.94 1047.38,764.94 989.05,764.94 979.38,774.61 979.38,789.34 986.38,796.34 1014.18,796.34 1014.73,795.79 1027.03,795.79 1027.58,796.34 1048.38,796.34 1052.38,800.34 1052.38,849 1061.35,857.97 1078.68,857.97 1082.38,861.67 1082.38,867.97 1078.68,871.67 1061.35,871.67 1052.38,880.64 1052.38,896.8 1056.02,900.43 1061.28,905.71 1075.02,905.71 1078.38,909.07 1078.38,921.34 1071.38,928.34 SH3.2@1071.38,941.83
  Top Layer w3.8: R34.1@556.45,553.1 557.33,552.22 603.22,552.22 v1(603.27,552.27)
  Signal Layer 2 w3.8: v1(603.27,552.27) 612.2,543.34 623.38,543.34 632.38,534.34 665.11,534.34 691.11,508.34 727.65,508.34 759.38,540.07 759.38,547.07 766.65,554.34 776.38,554.34 v1(783.38,561.34) 790.38,554.34 800.11,554.34 808.51,545.93 808.51,534.93 811.11,532.34 816.65,532.34 819.38,535.07 819.38,555.34 828.38,564.34 844.11,564.34 851.38,557.07 851.38,550.34 853.38,548.34 864.38,548.34 866.38,550.34 866.38,556.07 874.65,564.34 889.11,564.34 897.38,556.07 897.38,545.34 899.38,543.34 911.38,543.34 913.38,545.34 913.38,557.07 921.34,565.03 938.69,565.03 946.65,557.07 946.65,543.07 950.36,539.36 958.45,539.36 960.29,541.19 960.29,554.43 961.34,555.48 963.78,557.93 971.77,565.92 ; 971.78,565.92 980.81,574.96 980.81,592.5 1024.38,636.07 1024.38,783.01 1034.42,793.06 1051.25,793.06 1059.18,785.13 1059.45,785.13 1059.45,623.68 1012.38,576.61 1012.38,566.34 1015.38,563.34 1026.55,563.34 1033.55,570.34 v1(1034.55,570.34)
  Bottom Layer w3.7: U7.J7@720.46,533.6 720.46,530.26 729.38,521.34 736.1,521.34 759.1,544.34 759.1,546.79 761.88,549.57 761.88,549.84 767.38,555.34 777.38,555.34 v1(783.38,561.34)
DRAM_SDCLK1_B: R34.2 SH4.2 U7.K7 U8.K7 | length 2113.8
  Top Layer w3.7: v1(783.38,538.34) 790.38,545.34 801.38,545.34 809.38,537.34 809.38,525.61 821.65,513.34 835.2,513.34 U8.K7@846.43,502.11 ; v1(1033.88,547.34) 1040.88,554.34 1051.11,554.34 1059.38,562.61 1059.38,593.34 1051.38,601.34 1002.38,601.34 998.38,605.34 998.38,696.14 1002.08,699.84 1048.39,699.84 1057.38,708.83 1057.38,721.55 1048.39,730.54 1014.1,730.54 1010.38,734.26 1010.38,739.52 1014.1,743.24 1051.01,743.24 1059.38,751.61 1059.38,765.67 1051.11,773.94 992.78,773.94 988.38,778.34 988.38,783.34 992.38,787.34 1010.45,787.34 1011,786.79 1030.76,786.79 1031.31,787.34 1052.11,787.34 1061.38,796.61 1061.38,845.27 1065.08,848.97 1082.41,848.97 1091.38,857.94 1091.38,873.34 1084.05,880.67 1065.08,880.67 1061.38,884.37 1061.38,893.07 1065.02,896.71 1078.74,896.71 1087.38,905.34 1087.38,921.06 1096.38,930.06 SH4.2@1096.38,941.83
  Top Layer w3.8: R34.2@556.45,523.58 558.28,525.41 v1(603.27,525.41)
  Signal Layer 2 w3.8: v1(603.27,525.41) 612.2,534.34 619.65,534.34 628.65,525.34 661.38,525.34 687.38,499.34 731.38,499.34 768.38,536.34 768.38,543.34 770.38,545.34 776.38,545.34 v1(783.38,538.34) 790.38,545.34 796.38,545.34 799.51,542.2 799.51,531.2 807.38,523.34 820.38,523.34 828.09,531.06 828.38,531.06 828.38,551.61 832.11,555.34 840.38,555.34 842.38,553.34 842.38,546.61 849.65,539.34 868.11,539.34 875.38,546.61 875.38,552.34 878.38,555.34 885.38,555.34 888.38,552.34 888.38,541.61 895.65,534.34 915.11,534.34 922.38,541.61 922.38,553.34 925.07,556.03 934.96,556.03 937.65,553.34 937.65,539.34 946.63,530.36 961.45,530.36 967.77,536.67 968.09,536.99 968.09,551.19 988.61,571.71 988.61,587.57 1033.38,632.34 1033.38,779.28 1038.15,784.06 1047.53,784.06 1050.45,781.13 1050.45,627.41 1003.38,580.34 1003.38,562.61 1011.65,554.34 1024.88,554.34 1031.88,547.34 v1(1033.88,547.34)
  Bottom Layer w3.7: U7.K7@720.46,502.11 720.46,507.42 725.38,512.34 739.83,512.34 768.1,540.61 768.1,543.06 770.88,545.84 770.88,546.11 771.11,546.34 775.38,546.34 v1(783.38,538.34)
DRAM_SDODT0: U3.AC16 U7.K1 U8.K1 U9.K1 U10.K1 | length 2714.2
  Top Layer w4.7: U8.K1@657.46,502.11 658.71,503.34 671.33,503.34 675.6,507.62 685.31,517.34 694.38,517.34 702.74,508.98 708.02,508.98 711.74,512.7 711.74,517.98 702.31,527.41 702.31,534.33 714.93,546.95 728.42,546.95 733.16,542.21 750.51,542.21 773.38,519.34 789.05,519.34 v1(798.45,509.94) ; U3.AC16@1154.87,1082.38 v1(1170.62,1066.63) ; U10.K1@1224.39,502.11 1224.73,502.44 1237.01,502.44 1251.91,517.34 1260.38,517.34 1267.56,510.16 1274.2,510.16 1277.53,513.49 1277.53,520.13 1270.38,527.28 1270.38,540.34 1279.38,549.34 1317.38,549.34 1327.38,539.34 1327.38,532.34 1340.38,519.34 1355.98,519.34 v1(1365.38,509.94)
  Signal Layer 1 w4.5: v1(1081.88,509.94) 1081.88,499.34 1086.73,494.49 1088.19,494.49 1088.34,494.34 1100.63,494.34 1105.63,489.34 1105.63,472.09 1125.38,452.34 1125.38,415.35 1151,389.73 1161.95,389.73 1164.38,392.16 1164.38,404.34 1169.38,409.34 1177.38,409.34 1182.38,414.34 1182.38,426.34 1177.38,431.34 1169.38,431.34 1164.38,436.34 1164.38,447.34 1169.38,452.34 1178.38,452.34 1182.38,456.34 1182.38,465.34 1187.38,470.34 1195.38,470.34 1200.38,465.34 1200.38,457.34 1205.38,452.34 1217.38,452.34 1222.38,457.34 1222.38,467.34 1216.88,472.84 1216.88,492.59 1212.38,497.09 1193.66,497.09 1186.34,504.41 1165.34,504.41 1143.87,525.88 1143.87,602.34 1135.37,610.84 1135.37,820.9 1203.88,889.41 1203.88,901.34 1201.38,903.84 1185.88,903.84 1179.13,897.09 1158.38,897.09 1153.38,902.09 1153.38,927.34 1158.38,932.34 1176.38,932.34 1180.88,936.84 1180.88,955.34 1185.88,960.34 1207.57,960.34 1211.38,964.15 1211.38,969.53 1207.57,973.34 1184.48,973.34 1180.38,977.44 1180.38,983.24 1184.48,987.34 1205.99,987.34 1210.38,991.73 1210.38,997.94 1205.99,1002.34 1178.07,1002.34 1173.38,1007.02 1173.38,1013.65 1178.07,1018.34 1185.38,1018.34 1190.38,1023.34 1190.38,1029.43 1185.87,1033.94 1185.87,1041.46 1176.94,1050.39 1175.62,1050.39 1170.62,1055.39 v1(1170.62,1066.63)
  Signal Layer 2 w4.5: v1(798.45,509.94) 858.53,509.94 866.83,501.64 940.1,501.64 953.8,515.34 991.38,515.34 1001.38,525.34 1066.48,525.34 v1(1081.88,509.94) 1101.38,509.94 1106.78,515.34 1189.58,515.34 1201.04,503.89 1214.83,503.89 1221.79,510.84 1262.48,510.84 1268.98,504.34 1280.78,504.34 1286.38,509.94 1296.38,509.94 1303.23,503.09 1314.53,503.09 1321.38,509.94 v1(1365.38,509.94)
  Bottom Layer w4.7: v1(798.45,509.94) 824.98,509.94 833.38,518.34 849.09,518.34 859.79,507.64 861.94,505.48 861.94,495.9 872.44,485.4 936.65,485.4 941.38,490.12 941.38,496.81 936.09,502.1 U7.K1@909.43,502.11 ; v1(1365.38,509.94) 1392.33,509.94 1399.73,517.34 1424.38,517.34 1429.38,512.34 1429.38,495.34 1438.38,486.34 1505.38,486.34 1510.38,491.34 1510.38,497.1 1505.38,502.1 U9.K1@1476.36,502.11
DRAM_SDQS0: U3.AE3 U8.F3 | length 1026.4
  Top Layer w3.7: U8.F3@720.45,628.09 719.48,627.1 719.48,612.34 722.39,609.43 726.73,609.43 731.63,614.34 737.38,614.34 741.38,610.34 741.38,609.58 745.38,605.58 753.9,605.58 771.37,623.06 771.37,851.35 765.38,857.34 620.08,857.34 611.63,848.89 562.1,848.89 550.83,860.16 550.83,936.07 561.1,946.34 578.56,946.34 588.83,936.07 588.83,898.89 593.83,893.89 628.33,893.89 633.33,898.89 633.33,946.95 642.72,956.34 655.99,956.34 665.38,946.95 665.38,932.34 671.24,926.48 689.52,926.48 745.42,982.38 745.42,995.34 742.42,998.34 737.38,998.34 736.66,997.62 731.1,997.62 727.16,1001.56 727.16,1007.12 729.91,1009.87 729.91,1017.81 731.49,1019.39 U3.AE3@745.42,1019.39
DRAM_SDQS0_B: U3.AD3 U8.G3 | length 1026.7
  Top Layer w3.7: U8.G3@720.45,596.59 757.63,596.58 780.37,619.33 780.37,855.08 769.11,866.34 616.35,866.34 607.9,857.89 565.83,857.89 559.83,863.89 559.83,932.34 564.83,937.34 574.83,937.34 579.83,932.34 579.83,895.16 590.1,884.89 632.06,884.89 642.33,895.16 642.33,943.22 646.45,947.34 652.26,947.34 656.38,943.22 656.38,928.61 667.51,917.48 693.99,917.48 754.42,977.91 754.42,1002.38 760.67,1008.63 760.67,1026.05 745.42,1041.3 U3.AD3@745.42,1050.88
DRAM_SDQS1: U3.AD6 U8.C7 | length 657.2
  Top Layer w3.7: U3.AD6@839.91,1050.88 823.66,1034.63 823.66,1015.87 823.53,1015.74 823.53,956.87 815.25,948.59 782.06,948.59 773.09,939.62 773.09,911.67 768.76,907.34 762.62,907.34 758.29,911.67 758.29,937.59 748.88,947 736.23,947 697.38,908.14 697.38,889.11 707.65,878.84 790.47,878.84 796.97,872.34 806.93,872.34 811,868.27 811,850.08 796.38,835.45 796.38,781.08 790.33,775.03 790.33,732.85 800.6,722.58 U8.C7@846.43,722.58